# EAGLE board LED PCB Rotated LEDs (EAGLE 7.2.0)

Size 99.49 x 82.6 mm. Coordinates in mm from the lower left corner, seen from the top.
Outline: 0,0 99.49,0 99.49,82.5 0.1,82.6 0,0
Copper layers (1*16): Top 0.035mm / dielectric 1.5mm / Bottom 0.035mm
Design rules "default": minimum track width 10mil, minimum drill 24mil, track to track 8mil, track to pad 8mil, pad to pad 8mil, via to via 8mil, smd to smd 8mil, copper to edge 40mil, drill to drill 8mil, minimum pad ring 10mil, minimum via ring 8mil, stop-mask expansion 4mil, vias tented up to drill 0mil, thermal gap 10mil
Holes 3.35 mm at 3.25,76.15 96.24,75.9 96.24,6.35 3.25,6.35
Holes 5.46 mm at 11.81,41.25 75.82,67.77 75.82,14.73
Holes 9.35 mm at 55.1,41.25
Holes 10.26 mm at 87.48,41.25

## Footprints (pad centres in the part's own frame; a part is rotated, then mirrored left to right if it is on the bottom)
CXM27 = smd 5.893 x 5.588: ANODE -17.247,11.481; CATHODE 11.455,-17.221 | hole 27.991: 0,0
RDIO_DPLY = smd 1.5 x 7.714 bottom: P1 -2.8,-4.53; P4 0,-4.53 | drill 1: P2 -2.794,0; P3 0,0

## Placement (x,y rotation side)
LED1  [CXM27]  55.02,62.26 90 top
LED2  [CXM27]  20.51,15.24 180 top
LED3  [CXM27]  20.51,67.26 90 top
LED4  [CXM27]  55.02,20.24 180 top
RDIO1  RDIO  [RDIO_DPLY]  78.43,56.35 0 top
RDIO2  RDIO  [RDIO_DPLY]  71.99,41.36 0 top
RDIO3  RDIO  [RDIO_DPLY]  75.17,24.23 180 top

## Library data of the parts
LED1-LED4 = cxm27
RDIO1-RDIO3 = rdio_deploy

## Text on the board
bPlace: 2 | 1 | 4 | 3 | 6 | 5
Document: LED Board V5.2 | Brown University CubeSat Team : EquiSat | Eddie Williams and Cameron Reid